# Altium PCB PCB1.PcbDoc
Units mil, origin at the board's own origin, x right, y up, seen from the top; angles counter-clockwise.
Board outline 2309.03 x 2309.03 mil, 2 copper layers (Top Layer, Bottom Layer); 31 components, 133 nets, 345 pads, 20 vias.
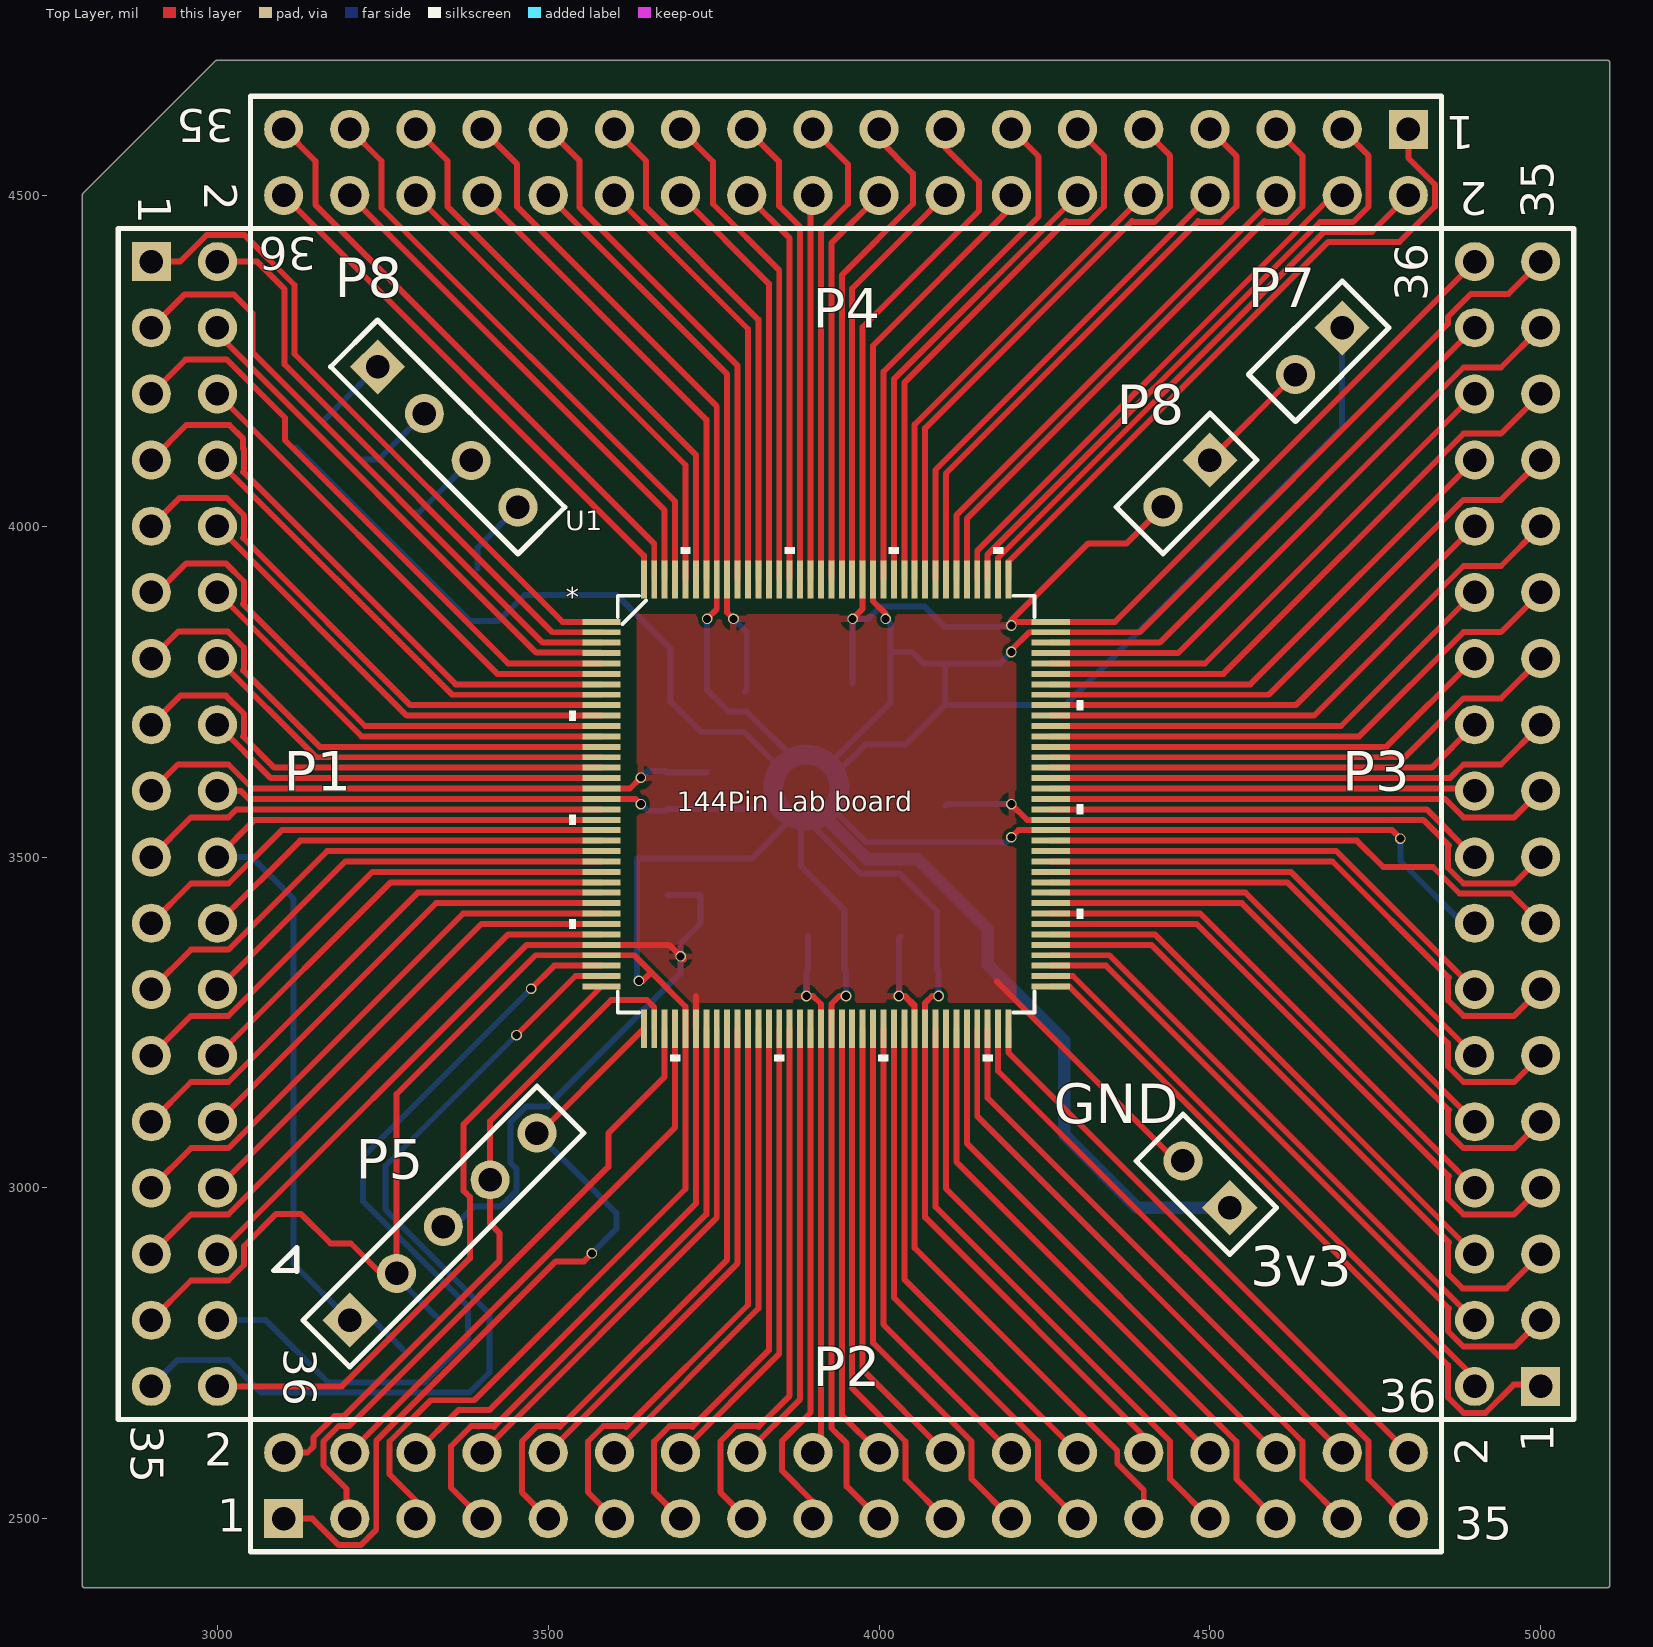
[diagram p0: Top Layer view]
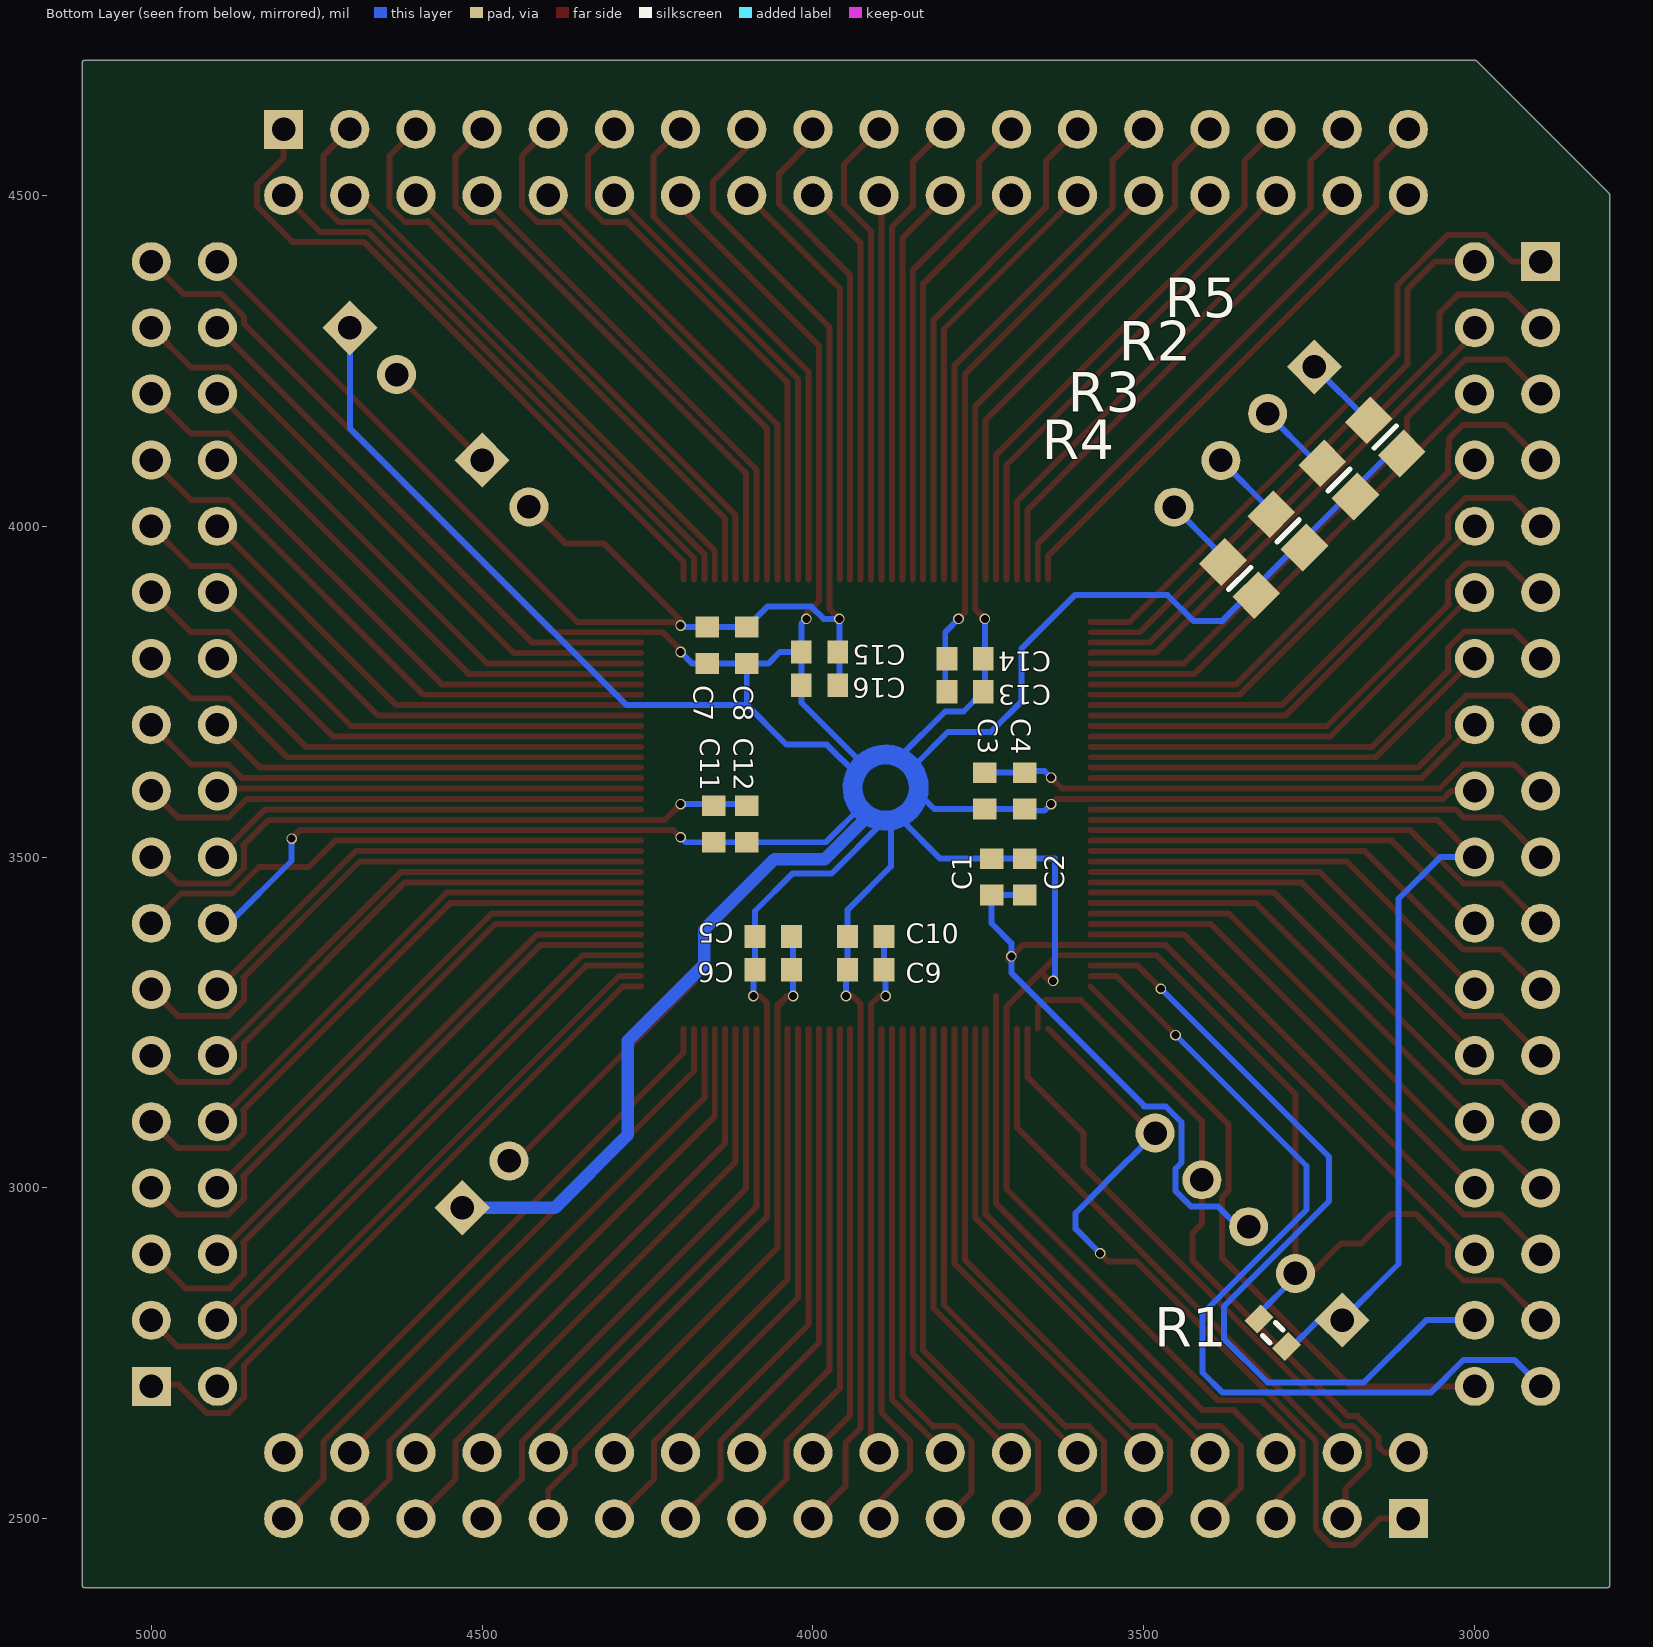
[diagram p1: Bottom Layer view, seen from below]

## Layer stack, top to bottom
Top Solder: solder mask 0.4, Solder Resist, Dk 3.5
Top Layer: signal copper 1.4
Dielectric 1: dielectric 12.6, FR-4, Dk 4.8
Bottom Layer: signal copper 1.4
Bottom Solder: solder mask 0.4, Solder Resist, Dk 3.5

## Board outline
2795.49,2400 ccw(c2800,2400) 2800,2395.49 5100,2395.49 ccw(c5100,2400) 5104.52,2400 5104.52,4700 ccw(c5100,4700) 5100,4704.52 3000,4704.52 ccw(c3000,4700) 2996.81,4703.19 2796.81,4503.19 ccw(c2800,4500) 2795.49,4500

## Design rules (kind name [scope] priority, off if disabled: settings)
Clearance [All] p1: gap=6
ComponentClearance [All] p1: gap=0 collisioncheckmode=3 verticalgap=0 showdistances=FALSE
HoleToHoleClearance [All] p1: gap=5 allowstackedmicrovias=TRUE
PolygonConnect [All] p1: connectstyle=Relief reliefconductorwidth=10 reliefentries=4 polygonreliefangle="90 Angle" airgapwidth=10
RoutingVias [All] p1: holewidth=28 width=50 viastyle="Through Hole" minholewidth=28 minwidth=50 maxholewidth=28 maxwidth=50
SolderMaskExpansion [All] p1: expansion=4
UnpouredPolygon [All] p1: allowunpoured=FALSE
Width [All] p1: maxlimit=30 minlimit=9 preferedwidth=9
27 further rules are at their usual default settings.

## Classes and differential pairs
component class Sheet2: 3v3 C1 C2 C3 C4 C5 C6 C7 C8 C9 C10 C11 C12 C13 C14 C15 C16 P1 P2 P3 P4 P5 P7 P8 R1 R2 R3 R4 R5
component class Sheet1: U1

## Components (designator, comment, footprint, x,y, rotation, side; value= is the part's Value field where it differs from the comment)
3v3 "Header 2" HDR1X2 4530,2970 r135 top (schematic designator P6)
C1 "Cap Semi" 1608[0603] 3730,3470 r90 bottom
C2 "Cap Semi" 1608[0603] 3680,3470 r90 bottom
C3 "Cap Semi" 1608[0603] 3740,3600 r270 bottom
C4 "Cap Semi" 1608[0603] 3680,3600 r270 bottom
C5 "Cap Semi" 1608[0603] 4060,3380 r0 bottom
C6 "Cap Semi" 1608[0603] 4060,3330 r0 bottom
C7 "Cap Semi" 1608[0603] 4160,3820 r270 bottom
C8 "Cap Semi" 1608[0603] 4100,3820 r270 bottom
C9 "Cap Semi" 1608[0603] 3920,3330 r0 bottom
C10 "Cap Semi" 1608[0603] 3920,3380 r0 bottom
C11 "Cap Semi" 1608[0603] 4150,3550 r270 bottom
C12 "Cap Semi" 1608[0603] 4100,3550 r270 bottom
C13 "Cap Semi" 1608[0603] 3770,3750 r180 bottom
C14 "Cap Semi" 1608[0603] 3770,3800 r180 bottom
C15 "Cap Semi" 1608[0603] 3990,3810 r0 bottom
C16 "Cap Semi" 1608[0603] 3990,3760 r0 bottom
P1 "Header 18X2" HDR2X18 2900,4400 r270 top
P2 "Header 18X2" HDR2X18 3100,2500 r0 top
P3 "Header 18X2" HDR2X18 5000,2700 r90 top
P4 "Header 18X2" HDR2X18 4800,4600 r180 top
P5 "Header 5" HDR1X5 3200,2800 r45 top
P7 "Header 2" HDR1X2 4700,4300 r225 top
P8 "Header 4" HDR1X4 3242,4241 r315 top
P8 "Header 2" HDR1X2 4500,4100 r225 top
R1 "Res3" J1-0603 3305,2781 r45 bottom
R2 "Res Thermal" 6-0805_N 3205,4070 r225 bottom
R3 "Res Thermal" 6-0805_N 3282,3993 r225 bottom
R4 "Res Thermal" 6-0805_N 3355,3921 r225 bottom
R5 "Res Thermal" 6-0805_N 3135,4135 r225 bottom
U1 "PIC32MZXXXXEC_G_144" TQFP144_16X16MC 3920,3580 r0 top

## Footprints (in the part's own frame and the unit in brackets; to place one, negate y for a bottom-side part, rotate by r counter-clockwise, add the part's x,y. Pads: shape width x height; smd on the part's side, far side on the other; paste and mask are expansions set on the pad)
6-0805_N [mm] "Chip Resistor, Body 2.0x1.2mm, IPC Medium Density"
  rect 1.2x1.4 smd: 1(-0.9,0) 2(0.9,0)
  silkscreen extent 0,-0.6 0,0.6, body extent -1.07,-0.7 1.07,0.7, height 0.7
1608[0603] [mm] "Chip Capacitor, Body 1.6x0.8mm, IPC High Density"
  rect 0.8x0.9 smd: 1(-0.7,0) 2(0.7,0)
  body extent -0.87,-0.48 0.87,0.48, height 1.3
HDR1X2 [mm] "Connector; Header; 2 Position"
  rect 1.5x1.5 hole 0.9: 1(0,0)
  round 1.5 hole 0.9: 2(2.54,0)
  silkscreen extent -1.27,-1.27 3.81,1.27
HDR1X4 [mm] "Connector; Header; 4 Position"
  rect 1.5x1.5 hole 0.9: 1(0,0)
  round 1.5 hole 0.9: 2(2.54,0) 3(5.08,0) 4(7.62,0)
  silkscreen extent -1.27,-1.27 8.89,1.27
HDR1X5 [mm] "Connector; Header; 5 Position"
  rect 1.5x1.5 hole 0.9: 1(0,0)
  round 1.5 hole 0.9: 2(2.54,0) 3(5.08,0) 4(7.62,0) 5(10.16,0)
  silkscreen extent -1.27,-1.27 11.43,1.27
HDR2X18 [mm] "Connector; Header; 18x2 Position"
  rect 1.5x1.5 hole 0.9: 1(0,0)
  round 1.5 hole 0.9: 2(0,2.54) 3(2.54,0) 4(2.54,2.54) 5(5.08,0) 6(5.08,2.54) 7(7.62,0) 8(7.62,2.54) 9(10.16,0) 10(10.16,2.54) 11(12.7,0) 12(12.7,2.54) 13(15.24,0) 14(15.24,2.54) 15(17.78,0) 16(17.78,2.54) 17(20.32,0) 18(20.32,2.54) 19(22.86,0) 20(22.86,2.54) 21(25.4,0) 22(25.4,2.54) 23(27.94,0) 24(27.94,2.54) 25(30.48,0) 26(30.48,2.54) 27(33.02,0) 28(33.02,2.54) 29(35.56,0) 30(35.56,2.54) 31(38.1,0) 32(38.1,2.54) 33(40.64,0) 34(40.64,2.54) 35(43.18,0) 36(43.18,2.54)
  silkscreen extent -1.27,-1.27 44.45,3.81
J1-0603 [mm] "Chip Resistor, Body 1.6x0.8mm, IPC High Density"
  rect 0.7x0.9 smd: 1(-0.75,0) 2(0.75,0)
  silkscreen extent -0.2,-0.35 0.2,0.35, body extent -0.85,-0.48 0.85,0.48, height 0.9
TQFP144_16X16MC [mil]
  rect 58x9 smd: 1(-339.5,275.59) 2(-339.5,259.84) 3(-339.5,244.09) 4(-339.5,228.35) 5(-339.5,212.6) 6(-339.5,196.85) 7(-339.5,181.1) 8(-339.5,165.35) 9(-339.5,149.61) 10(-339.5,133.86) 11(-339.5,118.11) 12(-339.5,102.36) 13(-339.5,86.61) 14(-339.5,70.87) 15(-339.5,55.12) 16(-339.5,39.37) 17(-339.5,23.62) 18(-339.5,7.87) 19(-339.5,-7.87) 20(-339.5,-23.62) 21(-339.5,-39.37) 22(-339.5,-55.12) 23(-339.5,-70.87) 24(-339.5,-86.61) 25(-339.5,-102.36) 26(-339.5,-118.11) 27(-339.5,-133.86) 28(-339.5,-149.61) 29(-339.5,-165.35) 30(-339.5,-181.1) 31(-339.5,-196.85) 32(-339.5,-212.6) 33(-339.5,-228.35) 34(-339.5,-244.09) 35(-339.5,-259.84) 36(-339.5,-275.59) 73(339.5,-275.59) 74(339.5,-259.84) 75(339.5,-244.09) 76(339.5,-228.35) 77(339.5,-212.6) 78(339.5,-196.85) 79(339.5,-181.1) 80(339.5,-165.35) 81(339.5,-149.61) 82(339.5,-133.86) 83(339.5,-118.11) 84(339.5,-102.36) 85(339.5,-86.61) 86(339.5,-70.87) 87(339.5,-55.12) 88(339.5,-39.37) 89(339.5,-23.62) 90(339.5,-7.87) 91(339.5,7.87) 92(339.5,23.62) 93(339.5,39.37) 94(339.5,55.12) 95(339.5,70.87) 96(339.5,86.61) 97(339.5,102.36) 98(339.5,118.11) 99(339.5,133.86) 100(339.5,149.61) 101(339.5,165.35) 102(339.5,181.1) 103(339.5,196.85) 104(339.5,212.6) 105(339.5,228.35) 106(339.5,244.09) 107(339.5,259.84) 108(339.5,275.59)
  rect 9x58 smd: 37(-275.59,-339.5) 38(-259.84,-339.5) 39(-244.09,-339.5) 40(-228.35,-339.5) 41(-212.6,-339.5) 42(-196.85,-339.5) 43(-181.1,-339.5) 44(-165.35,-339.5) 45(-149.61,-339.5) 46(-133.86,-339.5) 47(-118.11,-339.5) 48(-102.36,-339.5) 49(-86.61,-339.5) 50(-70.87,-339.5) 51(-55.12,-339.5) 52(-39.37,-339.5) 53(-23.62,-339.5) 54(-7.87,-339.5) 55(7.87,-339.5) 56(23.62,-339.5) 57(39.37,-339.5) 58(55.12,-339.5) 59(70.87,-339.5) 60(86.61,-339.5) 61(102.36,-339.5) 62(118.11,-339.5) 63(133.86,-339.5) 64(149.61,-339.5) 65(165.35,-339.5) 66(181.1,-339.5) 67(196.85,-339.5) 68(212.6,-339.5) 69(228.35,-339.5) 70(244.09,-339.5) 71(259.84,-339.5) 72(275.59,-339.5) 109(275.59,339.5) 110(259.84,339.5) 111(244.09,339.5) 112(228.35,339.5) 113(212.6,339.5) 114(196.85,339.5) 115(181.1,339.5) 116(165.35,339.5) 117(149.61,339.5) 118(133.86,339.5) 119(118.11,339.5) 120(102.36,339.5) 121(86.61,339.5) 122(70.87,339.5) 123(55.12,339.5) 124(39.37,339.5) 125(23.62,339.5) 126(7.87,339.5) 127(-7.87,339.5) 128(-23.62,339.5) 129(-39.37,339.5) 130(-55.12,339.5) 131(-70.87,339.5) 132(-86.61,339.5) 133(-102.36,339.5) 134(-118.11,339.5) 135(-133.86,339.5) 136(-149.61,339.5) 137(-165.35,339.5) 138(-181.1,339.5) 139(-196.85,339.5) 140(-212.6,339.5) 141(-228.35,339.5) 142(-244.09,339.5) 143(-259.84,339.5) 144(-275.59,339.5)
  silkscreen extent -388,-388 388,388

## Part data
3v3 P7 P8: "Header, 2-Pin"
C1 C2 C3 C4 C5 C6 C7 C8 C9 C10 C11 C12 C13 C14 C15 C16: "Capacitor (Semiconductor SIM Model)"
P1 P2 P3 P4: "Header, 18-Pin, Dual row"
P5: "Header, 5-Pin"
P8: "Header, 4-Pin"
R1: "Resistor"
R2 R3 R4 R5: "Thermistor"
U1: library part PIC32MZXXXXEC_G_, "Imported"

## Via types
v1: diameter 16, hole 12, Top Layer to Bottom Layer, 20 vias

## Nets (pads, with @x,y where several pads share a name; then routed paths per layer and width w, separated by ;. In a path a pad name is that pad's centre, name@x,y a point inside that pad or via, vN(x,y) a via of type N, cw(c..) or ccw(c..) an arc to the next point about the centre after c; other vN are vias at no path point)
GND: 3v3.2 C1.1 C2.1 C3.1 C4.1 C5.1 C6.1 C7.1 C8.1 C9.1 C10.1 C11.1 C12.1 C13.1 C14.1 C15.1 C16.1 P1.17 P1.32 P2.6 P2.18 P2.27 P3.17 P3.36 P4.15 P4.28 P5.3 P8.2@4429.29,4029.29 U1.17 U1.32 U1.42 U1.54 U1.63 U1.89 U1.108 U1.123 U1.136 | length 9999.3
  Top Layer w9: P1.17 2940.03,3640.03 3016.58,3640.03 3052.99,3603.62 U1.17 3623.62,3603.62 v1(3640,3620) ; P1.32 3467.4,3367.4 U1.32 3682.6,3367.4 v1@3705,3345 ; P2.6 3364,2664 3411,2664 3723.15,2976.15 U1.42 3723.15,3289.85 3723,3290 ; P4.28 3770.39,4229.61 U1.136 3770.39,3869.61 v1(3780,3860) ; v1(3890,3290) 3900,3290 3912.13,3277.87 U1.54 3912.13,2665.69 3912,2665.82 P2.18@3912,2611 ; v1(3960,3860) 3975.12,3875.12 U1.123 3975.12,4301.12 4151,4477 4151,4521 4100,4572 P4.15 ; v1(4030,3290) v1@4037.86,3290 ; 4178,3312 4449.29,3040.71 3v3.2 ; v1(4200,3580) 4223.62,3556.38 U1.89 4822.41,3556.38 4861.09,3517.7 4859.97,3516.58 4859.97,3483.42 4883.42,3459.97 4959.97,3459.97 P3.17 ; v1@4200,3849.91 4200,3858 4316.29,3974.29 4374.29,3974.29 P8.2@4429.29,4029.29 ; v1(4200,3850) 4205.59,3855.59 U1.108 4356.59,3855.59 4900,4399 P3.36 ; P2.27 4400,2543.39 4359.97,2583.42 4359.97,2603.03 4053.86,2909.14 U1.63 4053.86,3274 ; v1@4037.86,3290 4040,3290 4053.86,3276.14 4053.86,3274 ; v1@4037.86,3290 4053.86,3274
  Bottom Layer w9: P5.3 3357.42,2941.42 3388.1,2972.1 3428.71,2972.1 3452.16,2995.55 3452.16,3028.71 3448.44,3032.44 3442.82,3038.06 3442.82,3099.42 3466.26,3122.87 3499.42,3122.87 3498.65,3123.65 3700,3325 v1(3700,3350) 3700,3370 3730,3400 C1.1 C2.1 ; v1(3640,3620) 3650,3630 3677.56,3630 C4.1 C3.1 ; v1(3780,3860) 3800,3840 3800,3752.44 C13.1 ; v1(3890,3290) 3890,3327.56 C9.1 C10.1 ; C16.1@3960,3762.44 v1(3960,3860) 3983.84,3860 4002.34,3878.5 4069.06,3878.5 C8.1 C7.1 4197.56,3847.56 v1(4200,3850) ; v1(4030,3290) 4030,3377.56 C5.1 ; C12.1 4102.44,3580 v1(4200,3580)
NetP1_1: P1.1 U1.1 | length 1000.2
  Top Layer w9: P1.1 2943.39,4400 2983.42,4440.03 3041.19,4440.03 3116.55,4364.66 3116.55,4260.45 3521.41,3855.59 U1.1
NetP1_2: P1.2 U1.2 | length 879.3
  Top Layer w9: P1.2 3060,4400 3101.55,4358.45 3101.55,4244.45 3506.16,3839.84 U1.2
NetP1_3: P1.3 U1.3 | length 953.6
  Top Layer w9: P1.3 2950,4350 3025,4350 3053,4322 3053,4263 3491.91,3824.09 U1.3
NetP1_4: P1.4 U1.4 | length 789.4
  Top Layer w9: P1.4 3000,4291 3481.91,3809.09 3579.75,3809.09 U1.4
NetP1_5: P1.5 U1.5 | length 912.2
  Top Layer w9: P1.5 2952,4252 3014,4252 3102,4164 3102,4130 3439.4,3792.6 U1.5
NetP1_6: P1.6 U1.6 | length 755.8
  Top Layer w9: P1.6 3423.15,3776.85 U1.6
NetP1_7: P1.7 U1.7 | length 894.9
  Top Layer w9: P1.7 2953,4153 3018,4153 3038.91,4132.09 3038.91,4117.7 3040.03,4116.58 3040.03,4083.42 3038.91,4082.3 3360.11,3761.1 U1.7
NetP1_8: P1.8 U1.8 | length 727.4
  Top Layer w9: P1.8 3354.65,3745.35 U1.8
NetP1_9: P1.9 U1.9 | length 849.8
  Top Layer w9: P1.9 2943,4043 3013.61,4043 3040.03,4016.58 3040.03,3983.42 3038.91,3982.3 3291.61,3729.61 U1.9
NetP1_10: P1.10 U1.10 | length 699
  Top Layer w9: P1.10 3286.14,3713.86 U1.10
NetP1_11: P1.11 U1.11 | length 824.5
  Top Layer w9: P1.11@2901,3892 2953,3944 3012.61,3944 3040.03,3916.58 3040.03,3883.42 3038.91,3882.3 3223.1,3698.11 U1.11
NetP1_12: P1.12 U1.12 | length 670.6
  Top Layer w9: P1.12 3217.64,3682.36 U1.12
NetP1_13: P1.13 U1.13 | length 791.4
  Top Layer w9: P1.13 2941,3841 3015.61,3841 3040.03,3816.58 3040.03,3783.42 3038.91,3782.3 3154.6,3666.61 U1.13
NetP1_14: P1.14 U1.14 | length 642.3
  Top Layer w9: P1.14 3149.13,3650.87 U1.14
NetP1_15: P1.15 U1.15 | length 765.5
  Top Layer w9: P1.15 2944,3744 3012.61,3744 3040.03,3716.58 3040.03,3683.42 3038.91,3682.3 3086.1,3635.12 U1.15
NetP1_16: P1.16 U1.16 | length 613.9
  Top Layer w9: P1.16 3080.63,3619.37 U1.16
NetP1_19: P1.19 U1.19 | length 710.4
  Top Layer w9: P1.19 2959.97,3559.97 3016.58,3559.97 3028.73,3572.13 U1.19
NetP1_20: P1.20 P5.1 R1.1 U1.20 | length 1549.6
  Top Layer w9: P1.20 3056.38,3556.38 U1.20 ; P5.1 P5.1@3200,2834.24
  Bottom Layer w9: P1.20 3052,3500 3115,3437 3115,2885 P5.1 3235.89,2800 R1.1@3279.95,2755.95
NetP1_21: P1.21 U1.21 | length 738.8
  Top Layer w9: P1.21 2959.97,3459.97 3016.58,3459.97 3097.24,3540.63 U1.21
NetP1_22: P1.22 U1.22 | length 632.2
  Top Layer w9: P1.22 3124.88,3524.88 U1.22
NetP1_23: P1.23 U1.23 | length 767.1
  Top Layer w9: P1.23 2959.97,3359.97 3016.58,3359.97 3165.74,3509.13 U1.23
NetP1_24: P1.24 U1.24 | length 660.6
  Top Layer w9: P1.24 3193.39,3493.39 U1.24
NetP1_25: P1.25 U1.25 | length 795.5
  Top Layer w9: P1.25 2959.97,3259.97 3016.58,3259.97 3234.25,3477.64 U1.25
NetP1_26: P1.26 U1.26 | length 689
  Top Layer w9: P1.26 3261.89,3461.89 U1.26
NetP1_27: P1.27 U1.27 | length 823.9
  Top Layer w9: P1.27 2959.97,3159.97 3016.58,3159.97 3302.75,3446.14 U1.27
NetP1_28: P1.28 U1.28 | length 717.4
  Top Layer w9: P1.28 3330.39,3430.39 U1.28
NetP1_29: P1.29 U1.29 | length 852.3
  Top Layer w9: P1.29 2959.97,3059.97 3016.58,3059.97 3371.25,3414.65 U1.29
NetP1_30: P1.30 U1.30 | length 745.7
  Top Layer w9: P1.30 3398.9,3398.9 U1.30
NetP1_31: P1.31 U1.31 | length 880.6
  Top Layer w9: P1.31 2959.97,2959.97 3016.58,2959.97 3439.76,3383.15 U1.31
NetP1_34: P1.34 U1.34 | length 1266.3
  Top Layer w9: v1(3474,3301) 3508.91,3335.91 U1.34
  Bottom Layer w9: P1.34 3073,2800 3167,2706 3313,2706 3379,2772 3379,2820.79 3220,2979.79 3220,3047 v1(3474,3301)
NetP1_35: P1.35 U1.35 | length 1383.1
  Top Layer w9: v1(3452,3231) 3541.16,3320.16 U1.35
  Bottom Layer w9: P1.35 2940.03,2740.03 3016.58,2740.03 3065.61,2691 3381.21,2691 3411.25,2721.04 3411.25,2809.75 3254,2967 3254,3033 v1(3452,3231)
NetP1_36: P1.36 U1.36 | length 962.7
  Top Layer w9: P1.36 3188,2700 3381.45,2893.45 3381.45,2986.21 3372.1,2995.55 3372.1,3096.01 U1.36
NetP2_1: P2.1 P5.5 U1.37 | length 1217.8
  Top Layer w9: P2.1 3143.39,2500 3183.42,2459.97 3216.58,2459.97 3240.03,2483.42 3240.03,2617.85 3511.18,2889 3554,2889 v1(3566,2901) ; P5.5 3486.75,3082.84 3617,3213.09 U1.37
  Bottom Layer w9: P5.5 3561,3004.69 3561,3004 3603,2962 3603,2938 v1(3566,2901)
NetP2_2: P2.2 P5.4 U1.38 | length 1032
  Top Layer w9: P2.2 3136,2600 3144.97,2608.97 3144.97,2622.79 3177.21,2655.03 3191.03,2655.03 3426,2890 3426,2932 3412.13,2945.87 P5.4 3412.13,3101.13 3595,3284 3649.26,3284 3660.16,3273.1 U1.38
NetP2_3: P2.3 U1.39 | length 979.9
  Top Layer w9: P2.3 3195.36,2504.64 3195.36,2545 3159.97,2580.39 3159.97,2616.58 3183.42,2640.03 3199.03,2640.03 3590.84,3031.84 3590.84,3082.84 3675.91,3167.91 U1.39
NetP2_4: P2.4 U1.40 | length 844.1
  Top Layer w9: P2.4 3691.65,3091.65 U1.40
NetP2_7: P2.7 U1.43 | length 941.5
  Top Layer w9: P2.7 3353,2547 3353,2609.61 3383.42,2640.03 3416.58,2640.03 3417.7,2638.91 3738.9,2960.11 U1.43
NetP2_8: P2.8 U1.44 | length 787.4
  Top Layer w9: P2.8 3754.65,2954.65 U1.44
NetP2_9: P2.9 U1.45 | length 907.3
  Top Layer w9: P2.9 3459.97,2540.03 3459.97,2616.58 3483.42,2640.03 3516.58,2640.03 3517.7,2638.91 3770.39,2891.61 U1.45
NetP2_10: P2.10 U1.46 | length 759
  Top Layer w9: P2.10 3786.14,2886.14 U1.46
NetP2_11: P2.11 U1.47 | length 878.9
  Top Layer w9: P2.11 3559.97,2540.03 3559.97,2616.58 3583.42,2640.03 3616.58,2640.03 3617.7,2638.91 3801.89,2823.1 U1.47
NetP2_12: P2.12 U1.48 | length 730.6
  Top Layer w9: P2.12 3817.64,2817.64 U1.48
NetP2_13: P2.13 U1.49 | length 850.6
  Top Layer w9: P2.13 3659.97,2540.03 3659.97,2616.58 3683.42,2640.03 3716.58,2640.03 3717.7,2638.91 3833.39,2754.6 U1.49
NetP2_14: P2.14 U1.50 | length 702.3
  Top Layer w9: P2.14 3849.13,2749.13 U1.50
NetP2_15: P2.15 U1.51 | length 822.2
  Top Layer w9: P2.15 3759.97,2540.03 3759.97,2616.58 3783.42,2640.03 3816.58,2640.03 3817.7,2638.91 3864.88,2686.1 U1.51
NetP2_16: P2.16 U1.52 | length 673.9
  Top Layer w9: P2.16 3880.63,2680.63 U1.52
NetP2_17: P2.17 U1.53 | length 777.9
  Top Layer w9: U1.53 3896.38,2660.23 3853,2616.85 3853,2573 3900,2526 P2.17
NetP2_20: P2.20 U1.56 | length 663.9
  Top Layer w9: U1.56 3943.62,2656.38 P2.20
NetP2_21: P2.21 U1.57 | length 798.8
  Top Layer w9: U1.57 3959.37,2697.24 4040.03,2616.58 4040.03,2559.97 P2.21
NetP2_22: P2.22 U1.58 | length 692.2
  Top Layer w9: U1.58 3975.12,2724.88 P2.22
NetP2_23: P2.23 U1.59 | length 827.1
  Top Layer w9: U1.59 3990.87,2765.74 4140.03,2616.58 4140.03,2559.97 P2.23
NetP2_24: P2.24 U1.60 | length 720.6
  Top Layer w9: U1.60 4006.61,2793.39 P2.24
NetP2_25: P2.25 U1.61 | length 855.5
  Top Layer w9: U1.61 4022.36,2834.25 4240.03,2616.58 4240.03,2559.97 P2.25
NetP2_26: P2.26 U1.62 | length 749
  Top Layer w9: U1.62 4038.11,2861.89 P2.26
NetP2_29: P2.29 U1.65 | length 912.3
  Top Layer w9: U1.65 4085.35,2971.25 4440.03,2616.58 4440.03,2559.97 P2.29
NetP2_30: P2.30 U1.66 | length 805.7
  Top Layer w9: U1.66 4101.1,2998.9 P2.30
NetP2_31: P2.31 U1.67 | length 940.6
  Top Layer w9: U1.67 4116.85,3039.76 4540.03,2616.58 4540.03,2559.97 P2.31
NetP2_32: P2.32 U1.68 | length 834.1
  Top Layer w9: U1.68 4132.6,3067.4 P2.32
NetP2_33: P2.33 U1.69 | length 969
  Top Layer w9: U1.69 4148.35,3108.26 4640.03,2616.58 4640.03,2559.97 P2.33
NetP2_34: P2.34 U1.70 | length 862.5
  Top Layer w9: U1.70 4164.09,3135.91 P2.34
NetP2_35: P2.35 U1.71 | length 997.4
  Top Layer w9: U1.71 4179.84,3176.76 4740.03,2616.58 4740.03,2559.97 P2.35
NetP2_36: P2.36 U1.72 | length 890.9
  Top Layer w9: U1.72 4195.59,3204.41 P2.36
NetP3_1: P3.1 U1.73 | length 1054.6
  Top Layer w9: U1.73 4287.53,3304.41 4859.97,2731.97 4859.97,2683.42 4883.42,2659.97 4916.58,2659.97 4959.16,2702.55 4997.45,2702.55 P3.1
NetP3_2: P3.2 U1.74 | length 905.1
  Top Layer w9: U1.74 4293,3320.16 4900,2713.16 P3.2
NetP3_3: P3.3 U1.75 | length 1017.3
  Top Layer w9: U1.75 4342.88,3335.91 4861.09,2817.7 4859.97,2816.58 4859.97,2783.42 4883.42,2759.97 4959.97,2759.97 P3.3
NetP3_4: P3.4 U1.76 | length 869
  Top Layer w9: U1.76 4348.35,3351.65 P3.4
NetP3_5: P3.5 U1.77 | length 1006.7
  Top Layer w9: U1.77 4411.39,3367.4 4861.09,2917.7 4859.97,2916.58 4859.97,2870.03 4882,2848 4948,2848 P3.5
NetP3_6: P3.6 U1.78 | length 840.6
  Top Layer w9: U1.78 4416.85,3383.15 P3.6
NetP3_7: P3.7 U1.79 | length 960.5
  Top Layer w9: U1.79 4479.89,3398.9 4861.09,3017.7 4859.97,3016.58 4859.97,2983.42 4883.42,2959.97 4959.97,2959.97 P3.7
NetP3_8: P3.8 U1.80 | length 812.3
  Top Layer w9: U1.80 4485.35,3414.65 P3.8
NetP3_9: P3.9 U1.81 | length 932.2
  Top Layer w9: U1.81 4548.39,3430.39 4861.09,3117.7 4859.97,3116.58 4859.97,3083.42 4883.42,3059.97 4959.97,3059.97 P3.9
NetP3_10: P3.10 U1.82 | length 783.9
  Top Layer w9: U1.82 4553.86,3446.14 P3.10
NetP3_11: P3.11 U1.83 | length 902.9
  Top Layer w9: U1.83 4616.9,3461.89 4859.97,3218.81 4859.97,3183.42 4883.42,3159.97 4959.97,3159.97 P3.11
NetP3_12: P3.12 U1.84 | length 755.5
  Top Layer w9: U1.84 4622.36,3477.64 P3.12
NetP3_13: P3.13 U1.85 | length 875.4
  Top Layer w9: U1.85 4685.4,3493.39 4861.09,3317.7 4859.97,3316.58 4859.97,3283.42 4883.42,3259.97 4959.97,3259.97 P3.13
NetP3_14: P3.14 U1.86 | length 727.1
  Top Layer w9: U1.86 4690.87,3509.13 P3.14
NetP3_15: P3.15 U1.87 | length 792.2
  Top Layer w9: U1.87 4722.12,3524.88 4762,3485 4817.37,3485 4837.18,3485 4877.21,3444.97 4955.03,3444.97 P3.15
NetP3_18: P3.18 U1.90 | length 670.4
  Top Layer w9: U1.90 4827.87,3572.13 P3.18
NetP3_19: P3.19 U1.91 | length 768.6
  Top Layer w9: U1.91 4855.52,3587.87 4883.42,3559.97 4959.97,3559.97 P3.19
NetP3_20: P3.20 U1.92 | length 642
  Top Layer w9: U1.92 4896.38,3603.62 P3.20
NetP3_21: P3.21 U1.93 | length 773.9
  Top Layer w9: U1.93 4862.76,3619.37 4883.42,3640.03 4940.03,3640.03 P3.21
NetP3_22: P3.22 U1.94 | length 667.4
  Top Layer w9: U1.94 4835.12,3635.12 P3.22
NetP3_23: P3.23 U1.95 | length 802.3
  Top Layer w9: U1.95 4794.26,3650.87 4883.42,3740.03 4940.03,3740.03 P3.23
NetP3_24: P3.24 U1.96 | length 695.8
  Top Layer w9: U1.96 4766.61,3666.61 P3.24
NetP3_25: P3.25 U1.97 | length 830.6
  Top Layer w9: U1.97 4725.75,3682.36 4883.42,3840.03 4940.03,3840.03 P3.25
NetP3_26: P3.26 U1.98 | length 724.1
  Top Layer w9: U1.98 4698.11,3698.11 P3.26
NetP3_27: P3.27 U1.99 | length 859
  Top Layer w9: U1.99 4657.25,3713.86 4883.42,3940.03 4940.03,3940.03 P3.27
NetP3_28: P3.28 U1.100 | length 752.5
  Top Layer w9: U1.100 4629.61,3729.61 P3.28
NetP3_29: P3.29 U1.101 | length 887.4
  Top Layer w9: U1.101 4588.75,3745.35 4883.42,4040.03 4940.03,4040.03 P3.29
NetP3_30: P3.30 U1.102 | length 780.9
  Top Layer w9: U1.102 4561.1,3761.1 P3.30
NetP3_31: P3.31 U1.103 | length 915.8
  Top Layer w9: U1.103 4520.24,3776.85 4883.42,4140.03 4940.03,4140.03 P3.31
NetP3_32: P3.32 U1.104 | length 809.3
  Top Layer w9: U1.104 4492.6,3792.6 P3.32
NetP3_33: P3.33 U1.105 | length 944.1
  Top Layer w9: U1.105 4451.74,3808.35 4883.42,4240.03 4940.03,4240.03 P3.33
NetP3_34: P3.34 U1.106 | length 837.6
  Top Layer w9: U1.106 4424.09,3824.09 P3.34
NetP4_1: P4.1 U1.109 | length 1027.1
  Top Layer w9: U1.109 4195.59,3946.64 4678.93,4429.97 4786.58,4429.97 4840.03,4483.42 4840.03,4516.58 4800,4556.61 P4.1
NetP4_2: P4.2 U1.110 | length 879.7
  Top Layer w9: U1.110 4179.84,3952.1 4672.71,4444.97 4744.97,4444.97 P4.2
NetP4_3: P4.3 U1.111 | length 965
  Top Layer w9: U1.111 4164.09,3957.57 4666.5,4459.97 4716.58,4459.97 4740.03,4483.42 4740.03,4559.97 P4.3
NetP4_4: P4.4 U1.112 | length 817.6
  Top Layer w9: U1.112 4148.35,3963.03 4685.31,4500 P4.4
NetP4_5: P4.5 U1.113 | length 928.9
  Top Layer w9: U1.113 4132.6,4011.39 4582.3,4461.09 4583.42,4459.97 4616.58,4459.97 4640.03,4483.42 4640.03,4559.97 P4.5
NetP4_6: P4.6 U1.114 | length 780.6
  Top Layer w9: U1.114 4116.85,4016.85 P4.6
NetP4_7: P4.7 U1.115 | length 900.5
  Top Layer w9: U1.115 4101.1,4079.89 4482.3,4461.09 4483.42,4459.97 4516.58,4459.97 4540.03,4483.42 4540.03,4559.97 P4.7
NetP4_8: P4.8 U1.116 | length 752.3
  Top Layer w9: U1.116 4085.35,4085.35 P4.8
NetP4_9: P4.9 U1.117 | length 872.2
  Top Layer w9: U1.117 4069.61,4148.39 4382.3,4461.09 4383.42,4459.97 4416.58,4459.97 4440.03,4483.42 4440.03,4559.97 P4.9
NetP4_10: P4.10 U1.118 | length 723.9
  Top Layer w9: U1.118 4053.86,4153.86 P4.10
NetP4_11: P4.11 U1.119 | length 843.8
  Top Layer w9: U1.119 4038.11,4216.9 4282.3,4461.09 4283.42,4459.97 4316.58,4459.97 4340.03,4483.42 4340.03,4559.97 P4.11
NetP4_12: P4.12 U1.120 | length 695.5
  Top Layer w9: U1.120 4022.36,4222.36 P4.12
NetP4_13: P4.13 U1.121 | length 794.6
  Top Layer w9: U1.121 4006.61,4233.61 4241,4468 4241,4559 P4.13
NetP4_16: P4.16 U1.124 | length 638.8
  Top Layer w9: U1.124 3959.37,4359.37 P4.16
NetP4_17: P4.17 U1.125 | length 763.2
  Top Layer w9: U1.125 3943.62,4373 ; 3943.62,4356 3943.62,4379.62 4051.21,4487.21 4051,4494.39 4051,4533 4000,4584 P4.17
NetP4_18: P4.18 U1.126 | length 610.4
  Top Layer w9: U1.126 3927.87,4427.87 P4.18
NetP4_19: P4.19 U1.127 | length 719.4
  Top Layer w9: P4.19 3953,4547 3953,4487 3912.13,4446.13 U1.127
NetP4_20: P4.20 U1.128 | length 582
  Top Layer w9: U1.128 3896.38,4496.38 P4.20
NetP4_21: P4.21 U1.129 | length 713.9
  Top Layer w9: P4.21 3849,4551 3849,4484 3880.63,4452.37 U1.129
NetP4_22: P4.22 U1.130 | length 607.4
  Top Layer w9: P4.22 3864.88,4435.12 U1.130
NetP4_23: P4.23 U1.131 | length 742.3
  Top Layer w9: P4.23 3749,4551 3749,4487 3849.13,4386.87 U1.131
NetP4_24: P4.24 U1.132 | length 635.8
  Top Layer w9: P4.24 3833.39,4366.61 U1.132
NetP4_25: P4.25 U1.133 | length 770.6
  Top Layer w9: P4.25 3648,4552 3648,4482 3817.64,4312.36 U1.133
NetP4_26: P4.26 U1.134 | length 664.1
  Top Layer w9: P4.26 3801.89,4298.11 U1.134
NetP4_27: P4.27 U1.135 | length 799
  Top Layer w9: P4.27 3547,4553 3547,4482 3786.14,4242.86 U1.135
NetP4_30: P4.30 U1.138 | length 720.9
  Top Layer w9: P4.30 3738.9,4161.1 U1.138
NetP4_31: P4.31 U1.139 | length 855.8
  Top Layer w9: P4.31 3348,4552 3348,4483 3723.15,4107.85 U1.139
NetP4_32: P4.32 U1.140 | length 749.3
  Top Layer w9: P4.32 3707.4,4092.6 U1.140
NetP4_33: P4.33 U1.141 | length 884.1
  Top Layer w9: P4.33 3248,4552 3248,4481 3691.65,4037.35 U1.141
NetP4_34: P4.34 U1.142 | length 777.6
  Top Layer w9: P4.34 3675.91,4024.09 U1.142
NetP4_35: P4.35 U1.143 | length 912.5
  Top Layer w9: P4.35 3148,4552 3148,4486 3660.16,3973.84 U1.143
NetP4_36: P4.36 U1.144 | length 806
  Top Layer w9: P4.36 3644.41,3955.59 U1.144
NetP7_2: P7.2 P8.1@4500,4100 | length 182.8
  Top Layer w9: P8.1@4500,4100 P7.2
NetP8_1: P8.1@3242,4241 R5.1 | length 114.3
  Bottom Layer w9: R5.1@3160.88,4160.88 3161.88,4160.88 P8.1@3242,4241
NetP8_2: P8.2@3312.71,4170.29 R2.1 | length 120.6
  Bottom Layer w9: R2.1@3220.88,4100.88 3243.3,4100.88 P8.2@3312.71,4170.29
NetP8_3: P8.3 R3.1 | length 115.1
  Bottom Layer w9: R3.1@3300.88,4020.88 3304.72,4020.88 P8.3
NetP8_4: P8.4 R4.1 | length 118.1
  Bottom Layer w9: R4.1@3393.05,3936.05 3393.05,3967.79 P8.4
VCC: 3v3.1 C1.2 C2.2 C3.2 C4.2 C5.2 C6.2 C7.2 C8.2 C9.2 C10.2 C11.2 C12.2 C13.2 C14.2 C15.2 C16.2 P1.18 P1.33 P2.5 P2.19 P2.28 P3.16 P3.35 P4.14 P4.29 P5.2 P7.1 R1.2 R2.2 R3.2 R4.2 R5.2 U1.18 U1.33 U1.41 U1.55 U1.64 U1.88 U1.107 U1.122 U1.137 | length 14073.8
  Top Layer w9: P1.33 2960,2860 2983.39,2860 ; 2983.42,2859.97 3016.58,2859.97 3040.03,2883.42 3040.03,2912.03 3088.88,2960.88 3126.12,2960.88 3171,2916 3201.76,2916 3247.05,2870.71 P5.2 3270.71,3141.71 3480.65,3351.65 U1.33 3629.75,3351.65 ; P1.18 3035.39,3600 3047.52,3587.87 U1.18 3632.13,3587.87 v1(3640,3580) ; P2.5 3300,2527.17 3259.97,2567.2 3259.97,2616.58 3322.39,2679 3388,2679 3707.4,2998.4 U1.41 3707.4,3274 3655.7,3325.7 ; P4.29 3453,4547 3453,4483 3754.65,4181.35 U1.137 3754.65,3874.65 v1(3740,3860) ; 3630.5,3350.91 3655.7,3325.7 ; v1(3637,3313) 3643,3313 3655.7,3325.7 ; v1(3950,3290) 3940,3290 3927.87,3277.87 U1.55 3927.87,2637.13 3951,2614 3951,2549 P2.19 ; v1(4010,3860) 4010,3867.76 3990.87,3886.9 U1.122 3990.87,4272.87 4200,4482 P4.14 ; v1(4090,3290) 4080,3290 4069.61,3279.61 U1.64 4069.61,2955.39 4400,2625 P2.28 ; v1(4200,3530) 4210.63,3540.63 U1.88 4775.37,3540.63 v1(4788,3528) ; v1(4200,3810) 4200,3812.94 4226.9,3839.84 U1.107 4393.84,3839.84 4859.97,4305.97 4859.97,4316.58 4894.39,4351 4951,4351 P3.35
  Bottom Layer w9: R5.2@3119.12,4119.12 3381.24,3857 3425,3857 3464,3896 3604,3896 3685,3815 3685,3735 3731,3689 3796,3689 3849.5,3635.5 ; P5.2 3270.71,2865.4 R1.2@3330.06,2806.05 ; v1(3637,3313) 3634,3316 3634,3497.56 C2.2 C1.2 3807.56,3497.56 3867.5,3557.5 ; v1(3640,3580) 3650,3570 3677.56,3570 C4.2 C3.2 3816.17,3572.44 3840.66,3596.93 ; v1(3740,3860) 3740,3752.44 C13.2 3772.44,3720 3800,3720 3867,3653 ; 3882,3553 3882,3486 3947.56,3420.44 C10.2 C9.2 3950,3327.56 v1(3950,3290) ; 3895,3552 3972,3475 4031,3475 4087.56,3418.44 C5.2 C6.2 4090,3327.56 v1(4090,3290) ; 3926.5,3576.5 3980.56,3522.44 C12.2 C11.2 4192.44,3522.44 v1(4200,3530) ; 3926.5,3642.5 4017.56,3733.56 C16.2 C15.2 ; 3932.5,3623.5 3979,3670 4040,3670 4100,3730 ; v1(4010,3860) 4017.56,3852.44 C15.2 ; v1(4200,3810) 4182.44,3792.44 C7.2 C8.2 ; P7.1 4700,4148 4282,3730 4100,3730 ; v1(4788,3528) 4788,3494 4882,3400 P3.16 ; C15.2 4050,3810 4067.56,3792.44 C8.2 ; 4100,3730 C8.2
  Bottom Layer w19: 3922,3557 3982,3497 4058,3497 4164,3391 4164,3338 4280,3222 4280,3080 4390,2970 3v3.1
  Bottom Layer w30: 3840.66,3596.93 cw(c3890,3605) 3841.71,3592.04

## Polygon pours and split planes (outlines as drawn)
GND on Top Layer "Top Layer-No Net" (solid, pour order 2): 3634,3867 4207,3867 4207,3280 3634,3280

## Silkscreen, mask and mechanical layers (free items; w line width, h text height)
Top Overlay:
  lines w8: 3085,2875 3120,2910 3120,2874 3119,2875 3085,2875
  text "GND" at 4264,3098 h60

## Text inside footprints (layer, text, board x,y; h text height)
P1: Top Overlay "36" at 3100,2758 h50 r270; Top Overlay "35" at 2869,2641 h50 r270; Top Overlay "1" at 2880,4500 h50 r270; Top Overlay "2" at 2980,4520 h50 r270
P2: Top Overlay "36" at 4755,2661 h50; Top Overlay "35" at 4869,2468 h50; Top Overlay "1" at 3000,2480 h50; Top Overlay "2" at 2980,2580 h50
P3: Top Overlay "36" at 4829,4340 h50 r90; Top Overlay "35" at 5020,4465 h50 r90; Top Overlay "1" at 5020,2600 h50 r90; Top Overlay "2" at 4920,2580 h50 r90
P4: Top Overlay "36" at 3150,4437 h50 r180; Top Overlay "35" at 3025,4630 h50 r180; Top Overlay "1" at 4900,4620 h50 r180; Top Overlay "2" at 4920,4520 h50 r180
U1: Top Overlay "*" at 3526.5,3878.46 h30; Top Overlay "144Pin Lab board" at 3694,3569 h30; Mechanical 1 "*" at 3526.5,3878.46 h30